# Altium PCB EE209_PCB_Team08.PcbDoc
Units mil, origin at the board's own origin, x right, y up, seen from the top; angles counter-clockwise.
Board outline 3690 x 3780 mil, 2 copper layers (Top Layer, Bottom Layer); 55 components, 37 nets, 188 pads, 0 vias.
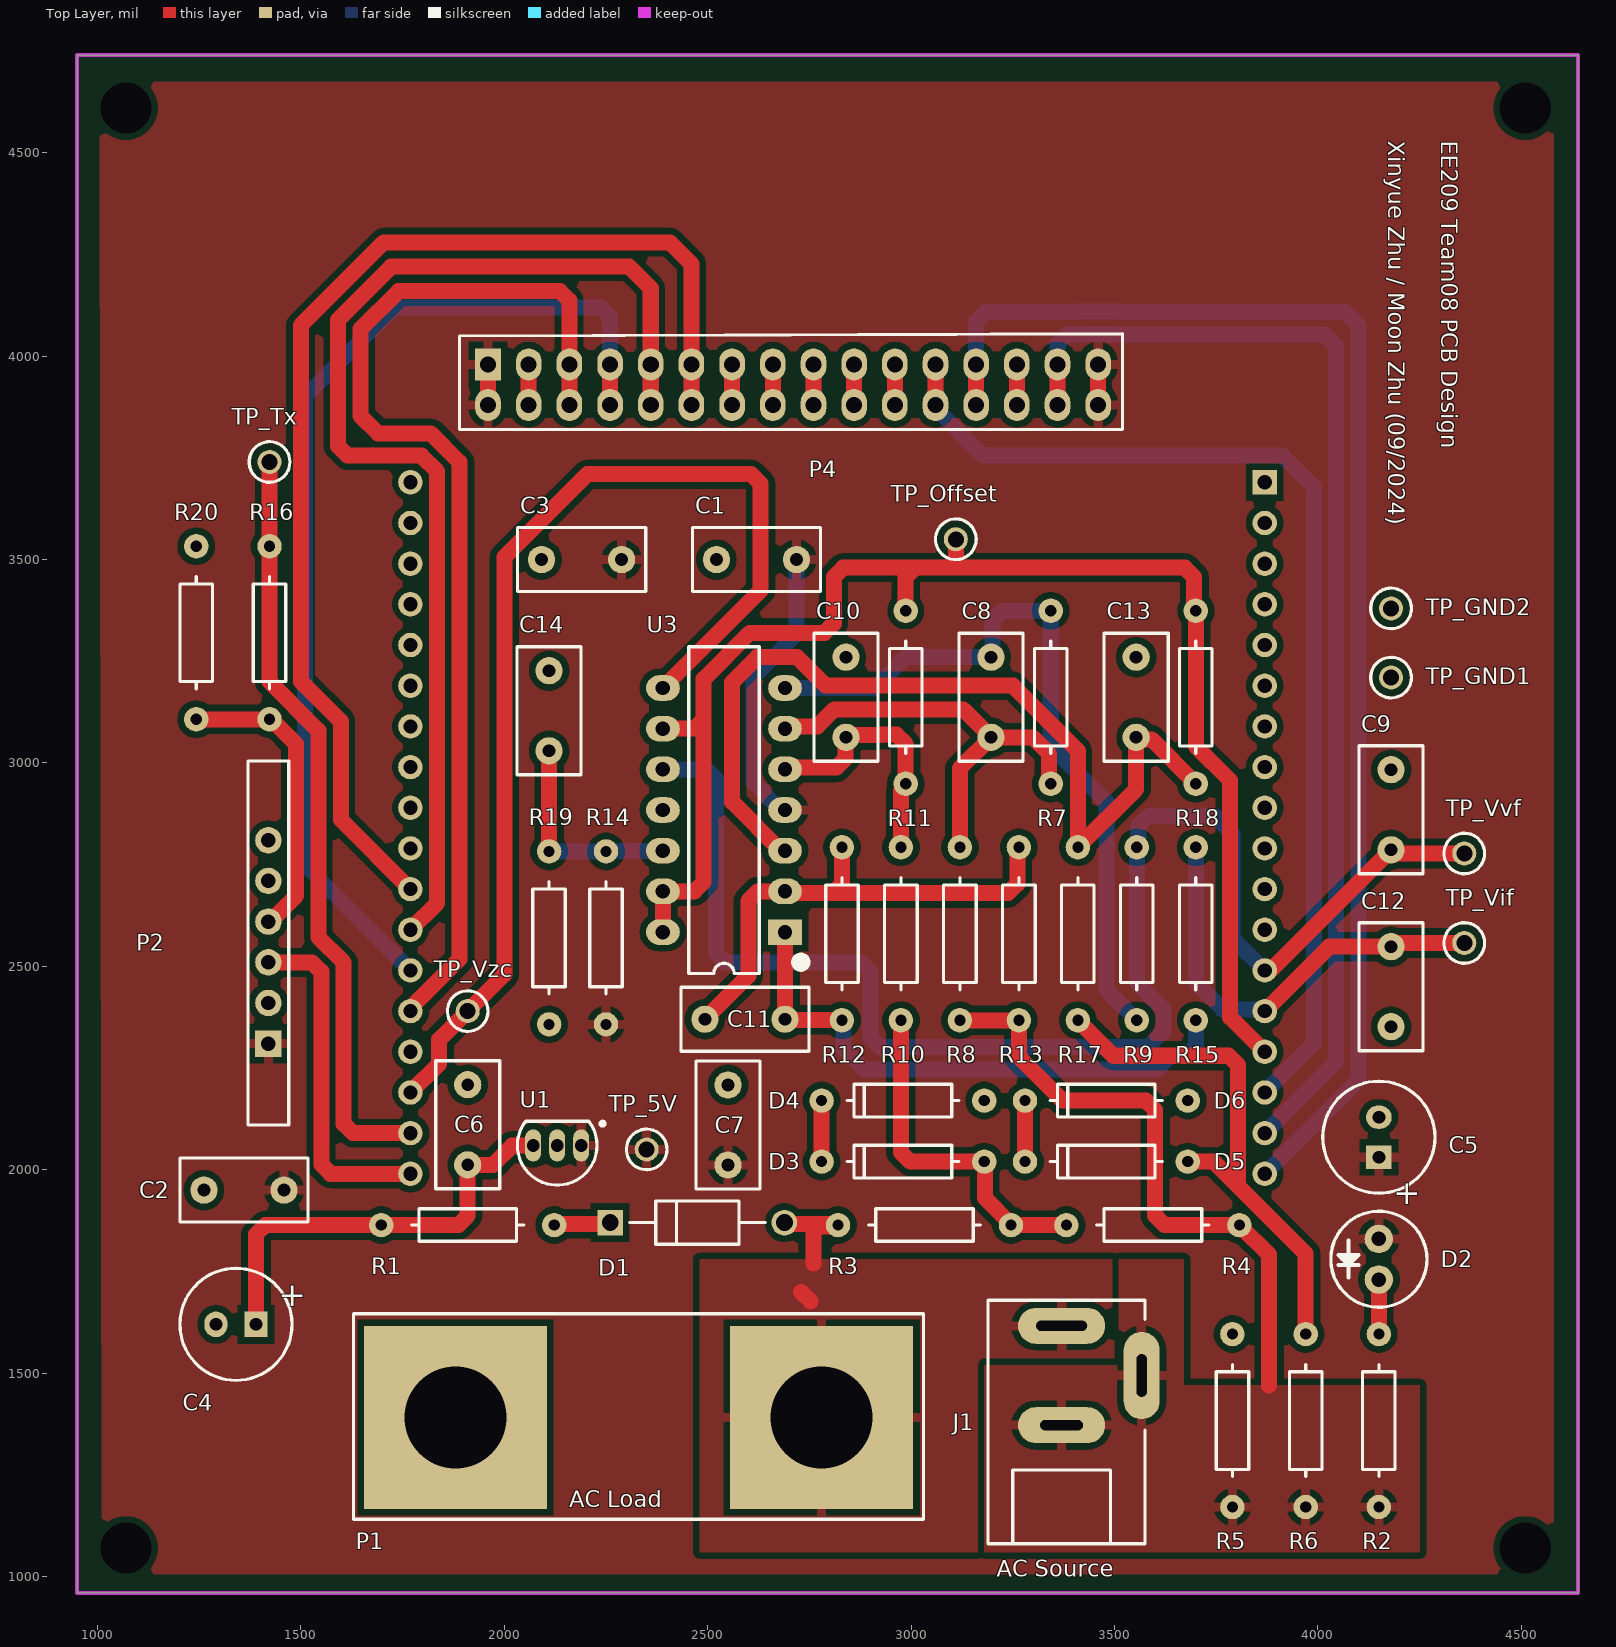
[diagram p0: Top Layer view]
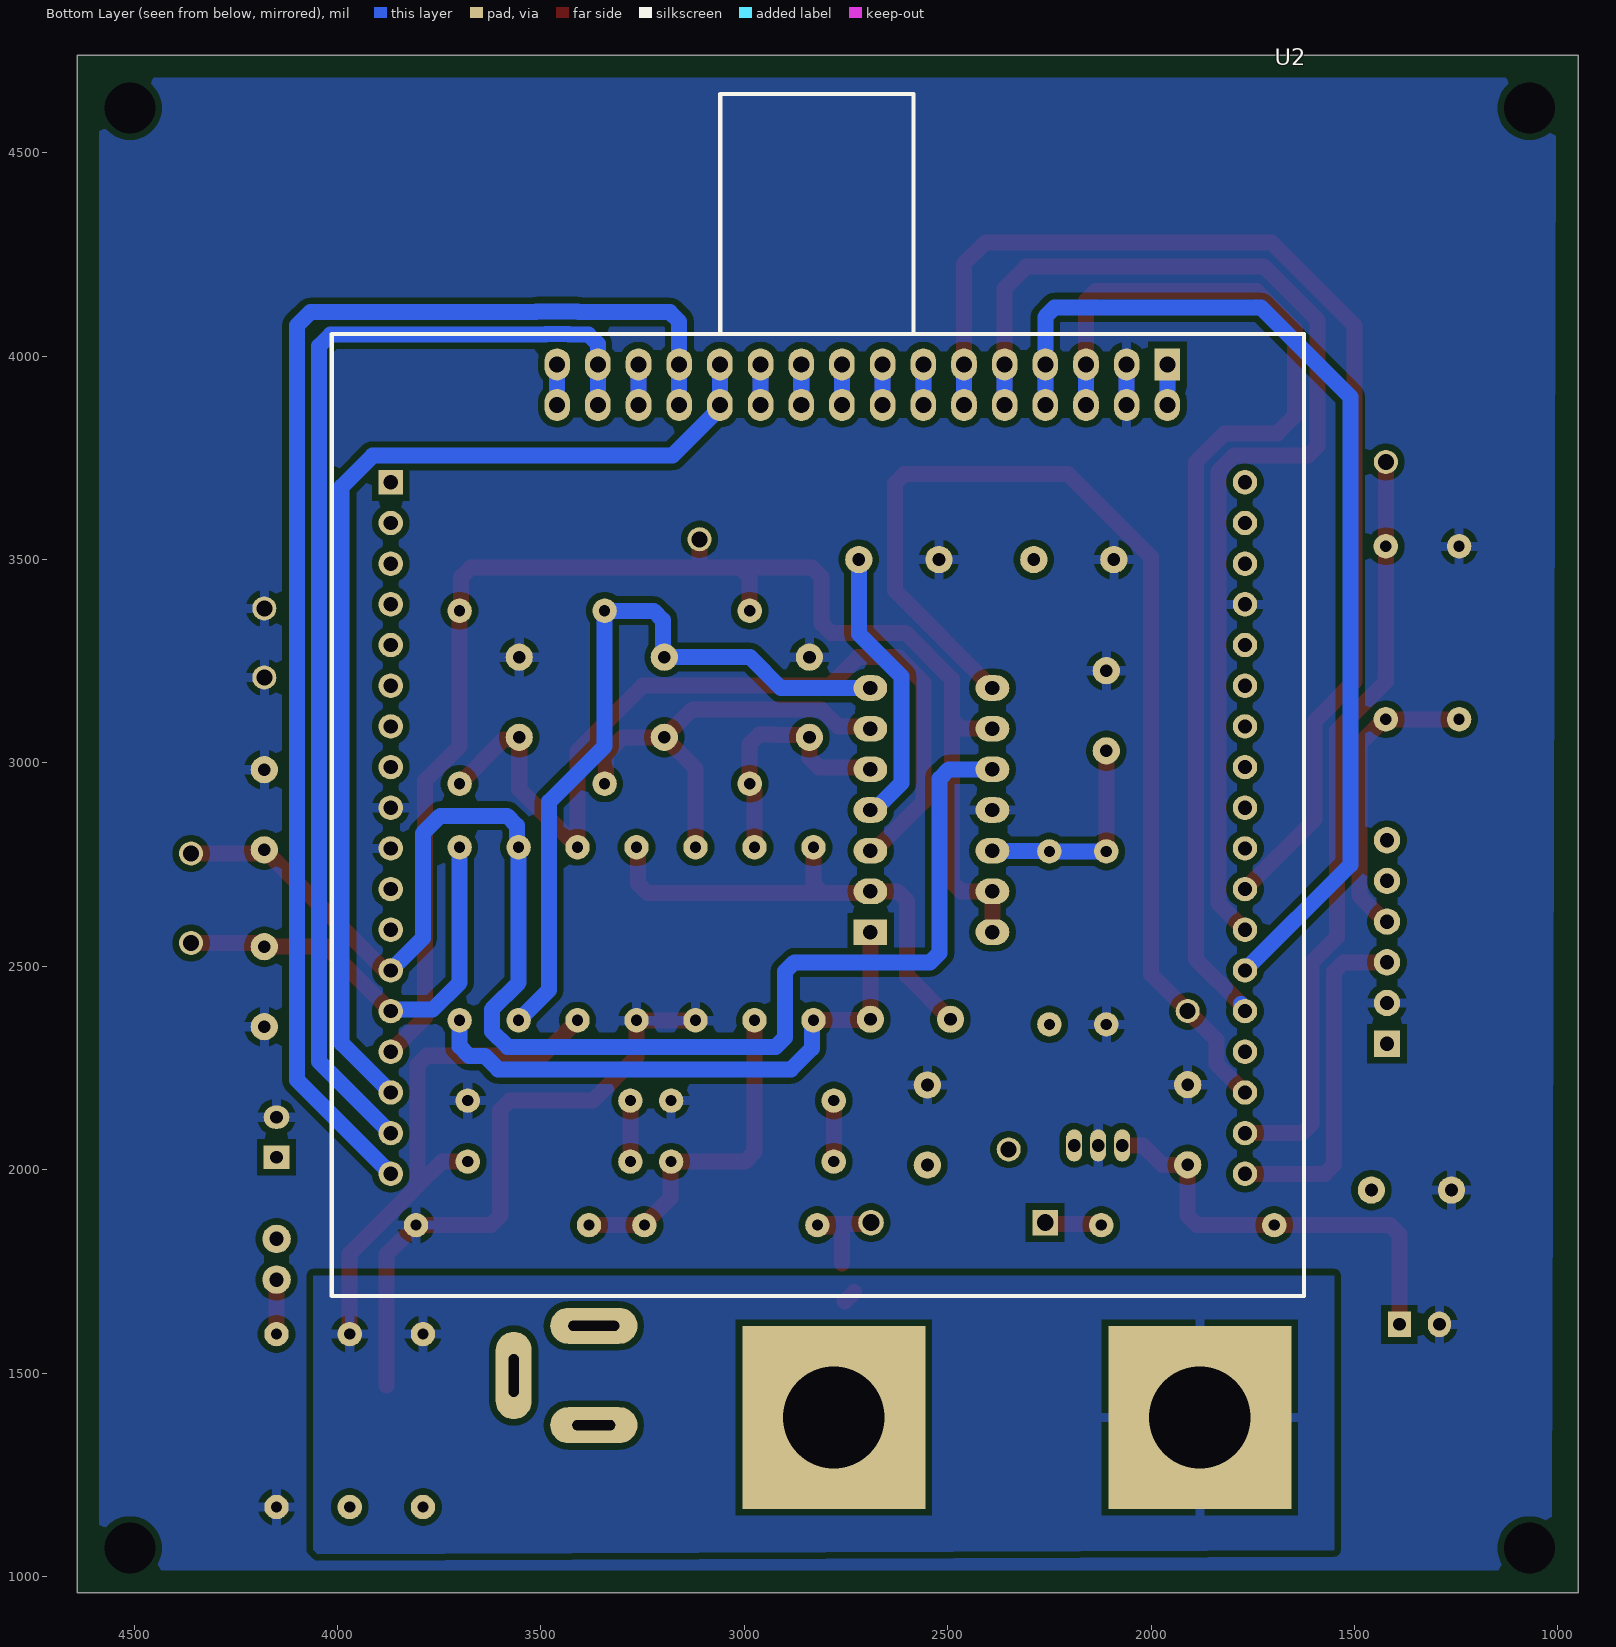
[diagram p1: Bottom Layer view, seen from below]
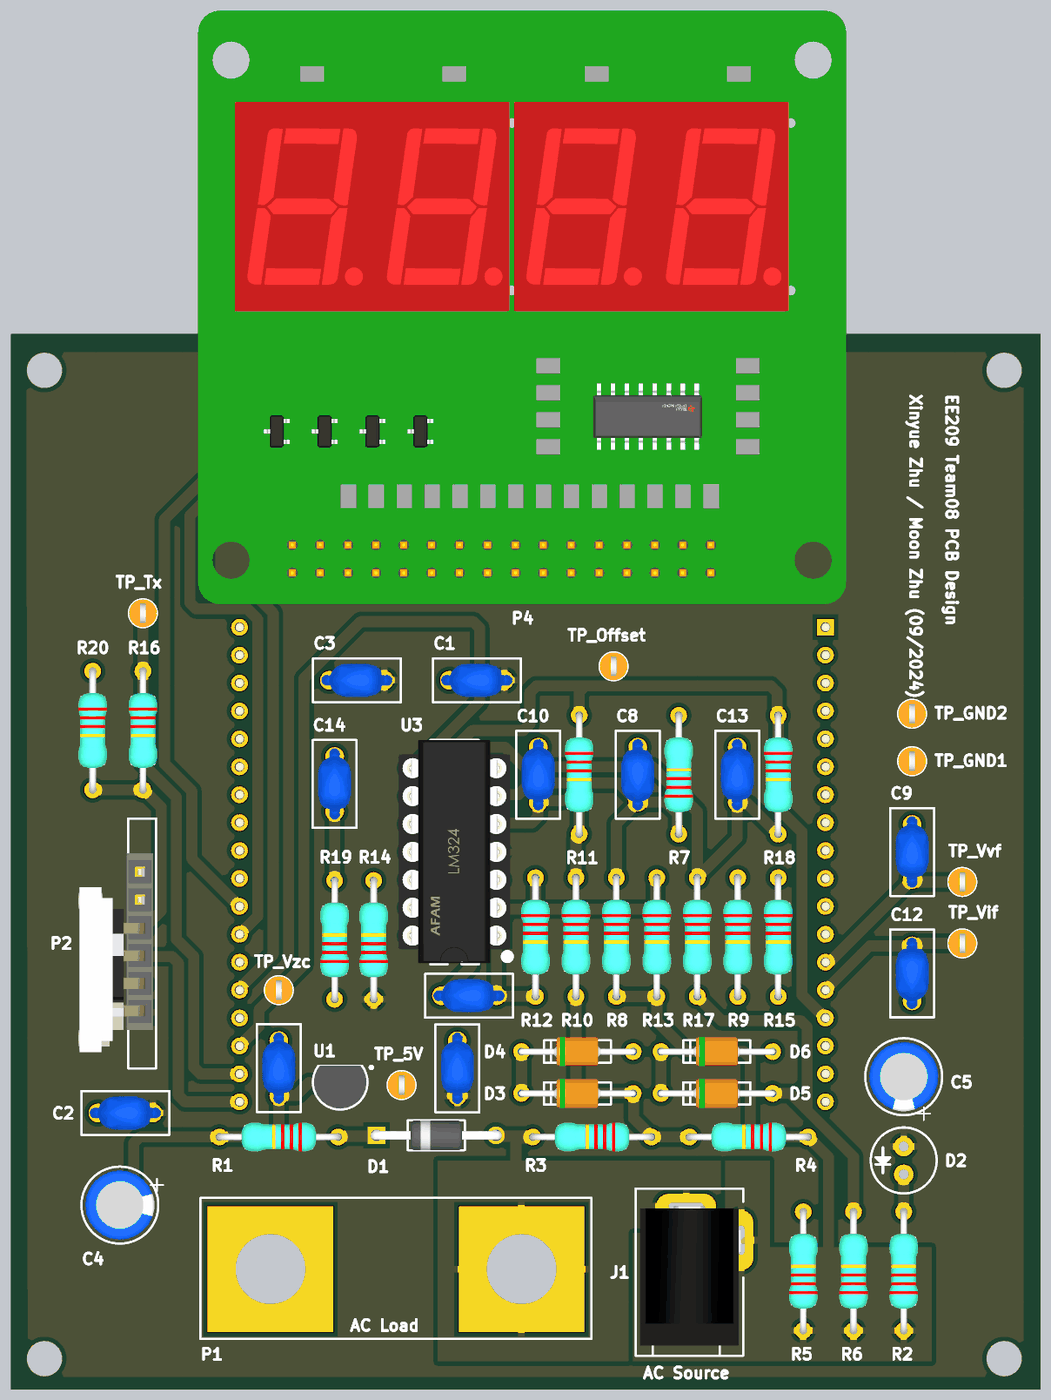
[diagram p2: 3D render of the assembled board from above, using the file's embedded part models]

## Layer stack, top to bottom
Top Solder: solder mask 0.4, Solder Resist, Dk 3.5
Top Layer: signal copper 1.4
Dielectric 1: dielectric 12.6, FR-4, Dk 4.8
Bottom Layer: signal copper 1.4
Bottom Solder: solder mask 0.4, Solder Resist, Dk 3.5

## Board outline
950,960 4640,960 4640,4740 950,4740

## Design rules (kind name [scope] priority, off if disabled: settings)
Clearance [All] p1: gap=15.75 ignorepadtopadclearanceinfootprint=FALSE
Height [All] p1: minheight=0 maxheight=1968.5 prefheight=11.81
HoleSize [All] p1: absolutevalues=TRUE maxlimit=393.7 minlimit=15.75 maxpercent=80.000 minpercent=20.000
PolygonConnect [All] p1: connectstyle=Relief reliefconductorwidth=23.62 reliefentries=4 polygonreliefangle="90 Angle" airgapwidth=15.75
RoutingVias [All] p1: holewidth=28 width=50 viastyle="Through Hole" minholewidth=28 minwidth=50 maxholewidth=28 maxwidth=50
SilkToSilkClearance [All] p1: silktosilkclearance=3.94
SilkToSolderMaskClearance [IsPad] p1: minsilkscreentomaskgap=3.94 clearancetoexposedcopper=TRUE
SolderMaskExpansion [All] p1: expansion=4 istentingtop=FALSE
SupplyNets "Schematic Supply Nets_24" [InNet('SH_ST')] p1: voltage=0.000
SupplyNets "Schematic Supply Nets_23" [InNet('GND')] p2: voltage=0.000
SupplyNets "Schematic Supply Nets_22" [InNet('Vrect')] p3: voltage=0.000
SupplyNets "Schematic Supply Nets_21" [InNet('RX')] p4: voltage=0.000
SupplyNets "Schematic Supply Nets_20" [InNet('LED3')] p5: voltage=0.000
SupplyNets "Schematic Supply Nets_19" [InNet('DS4')] p6: voltage=0.000
SupplyNets "Schematic Supply Nets_18" [InNet('Isensp')] p7: voltage=0.000
SupplyNets "Schematic Supply Nets_17" [InNet('SH_DS')] p8: voltage=0.000
SupplyNets "Schematic Supply Nets_16" [InNet('DS1')] p9: voltage=0.000
SupplyNets "Schematic Supply Nets_15" [InNet('OE')] p10: voltage=0.000
SupplyNets "Schematic Supply Nets_14" [InNet('SH_CP')] p11: voltage=0.000
SupplyNets "Schematic Supply Nets_13" [InNet('LED1')] p12: voltage=0.000
SupplyNets "Schematic Supply Nets_12" [InNet('TX')] p13: voltage=0.000
SupplyNets "Schematic Supply Nets_11" [InNet('Vzc')] p14: voltage=0.000
SupplyNets "Schematic Supply Nets_10" [InNet('Imeas')] p15: voltage=0.000
SupplyNets "Schematic Supply Nets_9" [InNet('Vmeas')] p16: voltage=0.000
SupplyNets "Schematic Supply Nets_8" [InNet('Vsensp')] p17: voltage=0.000
SupplyNets "Schematic Supply Nets_7" [InNet('DS2')] p18: voltage=0.000
SupplyNets "Schematic Supply Nets_6" [InNet('Offset')] p19: voltage=0.000
SupplyNets "Schematic Supply Nets_5" [InNet('LED2')] p20: voltage=0.000
SupplyNets "Schematic Supply Nets_4" [InNet('LED4')] p21: voltage=0.000
SupplyNets "Schematic Supply Nets_3" [InNet('5V')] p22: voltage=0.000
SupplyNets "Schematic Supply Nets_2" [InNet('SRCLR')] p23: voltage=0.000
SupplyNets "Schematic Supply Nets_1" [InNet('Vin')] p24: voltage=0.000
SupplyNets "Schematic Supply Nets" [InNet('DS3')] p25: voltage=0.000
Width [All] p1: maxlimit=393.7 minlimit=15.75 preferedwidth=23.62
26 further rules are at their usual default settings.

## Components (designator, comment, footprint, x,y, rotation, side; value= is the part's Value field where it differs from the comment)
C1 "*" CCAP-5P0 2620,3500 r180 top
C2 "*" CCAP-5P0 1360,1950 r180 top
C3 "*" CCAP-5P0 2190,3500 r180 top
C4 "*" "CAP-RAD-2.5mm Pitch" 1340.32,1620 r180 top
C5 "*" "CAP-RAD-2.5mm Pitch" 4150,2080 r90 top
C6 "*" CCAP-5P0 1910,2110.63 r90 top
C7 "*" CCAP-5P0 2550,2110 r90 top
C8 "*" CCAP-5P0 3196.64,3161.57 r270 top
C9 "*" CCAP-5P0 4180,2885 r90 top
C10 "*" CCAP-5P0 2840,3161.57 r90 top
C11 "*" CCAP-5P0 2591.57,2370 r180 top
C12 "*" CCAP-5P0 4180,2450 r270 top
C13 "*" CCAP-5P0 3553.27,3161.57 r90 top
C14 "*" CCAP-5P0 2110,3128.43 r90 top
D1 "1N4007" 1N4007-MFG 2474.42,1870 r0 top
D2 "Green" LED 4150,1780 r270 top
D3 "BZX79-CXVX" AXIAL-Zener-0.4 2980,2020 r180 top
D4 "BZX79-CXVX" AXIAL-Zener-0.4 2980,2170 r180 top
D5 "BZX79-CXVX" AXIAL-Zener-0.4 3480,2020 r180 top
D6 "BZX79-CXVX" AXIAL-Zener-0.4 3480,2170 r180 top
J1 "DC barrel jack" AC-Socket 3370,1380 r90 top value=socket
P1 "Dual Banana Plugs" "Dual Banana Plug" 2330,1390.79 r180 top
P2 "BLE Module Header" HM10_HDR1X6 1420,2310 r90 top
P4 "Display" Display 2660,3930 r180 top
R1 "*" AXIAL-0.4 1910,1864 r180 top
R2 "*" AXIAL-0.4 4150,1383.45 r90 top
R3 "*" AXIAL-0.4 3032.99,1864 r180 top
R4 "*" AXIAL-0.4 3594.48,1864 r180 top
R5 "*" AXIAL-0.4 3790,1383.45 r90 top
R6 "*" AXIAL-0.4 3970,1383.45 r90 top
R7 "*" AXIAL-0.4 3343.36,3161.57 r90 top
R8 "*" AXIAL-0.4 3120,2580 r270 top
R9 "*" AXIAL-0.4 3555,2580 r270 top
R10 "*" AXIAL-0.4 2975,2580 r270 top
R11 "*" AXIAL-0.4 2986.73,3161.57 r270 top
R12 "*" AXIAL-0.4 2830,2580 r270 top
R13 "*" AXIAL-0.4 3265,2580 r270 top
R14 "*" AXIAL-0.4 2250,2570 r90 top
R15 "*" AXIAL-0.4 3700,2580 r270 top
R16 "*" AXIAL-0.4 1422.86,3320 r270 top
R17 "*" AXIAL-0.4 3410,2580 r270 top
R18 "*" AXIAL-0.4 3700,3161.57 r270 top
R19 "*" AXIAL-0.4 2110,2570 r90 top
R20 "*" AXIAL-0.4 1242.74,3320 r270 top
TP_5V "5003" TP_TH 2350,2050 r90 top
TP_GND1 "5003" TP_TH 4180,3210 r90 top
TP_GND2 "5003" TP_TH 4180,3380 r90 top
TP_Offset "5003" TP_TH 3110,3550 r90 top
TP_Tx "5003" TP_TH 1422.86,3740 r90 top
TP_Vif "5003" TP_TH 4360,2557.48 r90 top
TP_Vvf "5003" TP_TH 4360,2777.52 r90 top
TP_Vzc "5003" TP_TH 1910,2390 r90 top
U1 "L78L05ACZ" TO-92 2130,2060 r90 top
U2 "ATmega328PB Xplained Mini Header" "ATmeg328P Xplained" 2819.21,2840 r180 bottom
U3 "LM324" DIP-14 2540,2884.33 r180 top

## Footprints (in the part's own frame and the unit in brackets; to place one, negate y for a bottom-side part, rotate by r counter-clockwise, add the part's x,y. Pads: shape width x height; smd on the part's side, far side on the other; paste and mask are expansions set on the pad)
1N4007-MFG [mm]
  round 1.6 hole 1.05 paste-2539.97 mask+0: 1(5.438,0)
  rect 1.6x1.6 hole 1.05 paste-2539.97 mask+0: 2(-5.438,0)
  silkscreen extent -4.24,-1.35 4.24,1.35, body extent -6.34,-1.45 6.34,1.45, height 0.25
AC-Socket [mm]
  oval 2.25x5.45 hole 0.635 slot 3.175 at 90 deg: 1(6,0)
  oval 5.45x2.25 hole 0.635 slot 2.667 at 0 deg: 2(2.9,-5)
  oval 2.25x5.45 hole 0.635 slot 2.667 at 90 deg: 3(-0.2,0)
  silkscreen extent -7.6,-5.2 7.6,4.6, body extent -6.7,-5 6,4.2, height 10.5
"ATmeg328P Xplained" [mil]
  rect 60x60 hole 35: 1(-1050,850)
  round 60 hole 35: 2(-1050,750) 3(-1050,650) 4(-1050,550) 5(-1050,450) 6(-1050,350) 7(-1050,250) 8(-1050,150) 9(-1050,50) 10(-1050,-50) 11(-1050,-150) 12(-1050,-250) 13(-1050,-350) 14(-1050,-450) 15(-1050,-550) 16(-1050,-650) 17(-1050,-750) 18(-1050,-850) 19(1050,-850) 20(1050,-750) 21(1050,-650) 22(1050,-550) 23(1050,-450) 24(1050,-350) 25(1050,-250) 26(1050,-150) 27(1050,-50) 28(1050,50) 29(1050,150) 30(1050,250) 31(1050,350) 32(1050,450) 33(1050,550) 34(1050,650) 35(1050,750) 36(1050,850)
  silkscreen extent -1195,-1150 1195,1805, body extent -1201,-1150 1161,1845, height 452
AXIAL-0.4 [mil]
  round 60 hole 27.56: 1(-212.6,0) 2(212.6,0)
  silkscreen extent -138,-40 138,40, body extent -224,-51 224,51, height 106
AXIAL-Zener-0.4 [mil]
  round 60 hole 27.56: 1(-200,0) 2(200,0)
  silkscreen extent -138,-40 138,40, body extent -211,-52 211,52, height 92
"CAP-RAD-2.5mm Pitch" [mm] "Cap 6.3 X 11.2"
  rect 1.45x1.6 hole 0.8: 1(-1.25,0)
  oval 1.45x1.6 hole 0.8: 2(1.25,0)
  silkscreen extent -3.5,-3.5 3.5,3.5, body extent -3.15,-3.15 3.15,3.15, height 11.5
CCAP-5P0 [mm]
  round 1.7 hole 0.8: 1(-2.5,0) 2(2.5,0)
  silkscreen extent -4,-2 4,2, body extent -3.25,-1.5 3.25,1.5, height 6.5
DIP-14 [mm] "DIP; 14 Leads; Row Spacing 7.62 mm; Pitch 2.54 mm"
  rect 2.1x1.6 hole 0.9: 1(-3.81,7.62)
  oval 2.1x1.6 hole 0.9: 2(-3.81,5.08) 3(-3.81,2.54) 4(-3.81,0) 5(-3.81,-2.54) 6(-3.81,-5.08) 7(-3.81,-7.62) 8(3.81,-7.62) 9(3.81,-5.08) 10(3.81,-2.54) 11(3.81,0) 12(3.81,2.54) 13(3.81,5.08) 14(3.81,7.62)
  silkscreen extent -5.1,-10.2 2.2,10.2, body extent -5.07,-10.2 5.09,10.12, height 9.47
Display [mm]
  rect 1.6x2 hole 1: 1(17.78,-1.27)
  oval 1.6x2 hole 1: 2(17.78,1.27) 3(15.24,-1.27) 4(15.24,1.27) 5(12.7,-1.27) 6(12.7,1.27) 7(10.16,-1.27) 8(10.16,1.27) 9(7.62,-1.27) 10(7.62,1.27) 11(5.08,-1.27) 12(5.08,1.27) 13(2.54,-1.27) 14(2.54,1.27) 15(0,-1.27) 16(0,1.27) 17(-2.54,-1.27) 18(-2.54,1.27) 19(-5.08,-1.27) 20(-5.08,1.27) 21(-7.62,-1.27) 22(-7.62,1.27) 23(-10.16,-1.27) 24(-10.16,1.27) 25(-12.7,-1.27) 26(-12.7,1.27) 27(-15.24,-1.27) 28(-15.24,1.27) 29(-17.78,-1.27) 30(-17.78,1.27) 31(-20.32,-1.27) 32(-20.32,1.27)
  silkscreen extent -21.84,-3.18 19.56,2.79, body extent -32.6,-50 26.4,4, height 13
"Dual Banana Plug" [mil] "Connector; 2 Position"
  rect 450x450 hole 250: 1(-450,0) 2(450,0)
  silkscreen extent -701,-255 701,250, body extent -684,-236 686,236, height 217
HM10_HDR1X6 [mil] "Connector; Header; 6 Position"
  rect 65x65 hole 35.43: 1(0,0)
  round 65 hole 35.43: 2(100,0) 3(200,0) 4(300,0) 5(400,0) 6(500,0)
  silkscreen extent -200,-50 695,50, body extent -142,-39 571,228, height 1843
LED [mil]
  round 70 hole 35.43: 1(-50,0) 2(50,0)
  silkscreen extent -118,-118 118,118, body extent -98,-98 98,98, height 413
TO-92 [mm] "TO, Flat Index; 3 In-Line, Axial Leads; Body Dia. 4.5mm; Leads 0.51 x 0.48 mm (max)"
  oval 2x1 hole 0.8: 1(0,-1.5) 2(0,0) 3(0,1.5)
  silkscreen extent -2.48,-2.96 1.5,2.48, body extent -2.4,-2.4 1.53,2.4, height 6.73
TP_TH [mm] "Test Point, Through Hole, Dia 2.54mm"
  round 1.5 hole 1: 1(0,0)
  silkscreen extent -1.27,-1.27 1.27,1.27, body extent -1.27,-1.27 1.27,1.27, height 4.57

## Part data
C1 C2 C3 C6 C7 C8 C9 C10 C11 C12 C13 C14: library part CerCap_TH_5P0, "TH ceramic capacitor with 5mm pitch"
C4 C5: library part ElecCap_TH_2P0, "Electrolytic capacitor with radial package, 2mm pitch and 5.2mm diameter", LatestRevisionDate=17-Jul-2002, LatestRevisionNote="Re-released for DXP Platform.", PackageDescription="Polarized Capacitor; 2 Leads", PackageReference=POLAR0.8, Published=8-Jun-2000, Publisher="Altium Limited"
D1: library part 1N4007_TH_4AX0, "1N4007 1000V standard axial diode", Supplier Part Number 1=1N4007RLGOSCT-ND, ComponentLink1Description=https://www.fairchildsemi.com/datasheets/1N/1N914.pdf, ComponentLink1URL=https://www.fairchildsemi.com/datasheets/1N/1N914.pdf, Supplier 1=Digi-Key
D2: library part LED_TH_2P54, "Typical throughole GaAs LED with 2.54mm pitch", Manufacturer="Generic Components", Class I=Optoelectronic, Class II=LED, Published=8-Jun-2000, Publisher="Altium Limited", Revision="July-2002: Re-released for DXP Platform."
D3 D4 D5 D6: library part Zener_TH_4AX0, "Axial zener diode BZX79 series", Manufacturer="Nexperia USA Inc.", Manufacturer Part Number=BZX79-C4V7,143, Operating Temperature="-65°C ~ 200°C", Package / Case="DO-204AH, DO-35, Axial", Supplier Device Package=DO-35, Supplier Part Number 1=1727-1864-1-ND, Tolerance=±5%, Category="Discrete Semiconductor Products", ComponentLink1Description=https://assets.nexperia.com/documents/data-sheet/BZX79.pdf, ComponentLink1URL=https://assets.nexperia.com/documents/data-sheet/BZX79.pdf, Mounting Type="Through Hole", Packaging="Cut Tape (CT)", Part Status=Active, Pricing 1="1=0.23, 10=0.206, 100=0.1123, 500=0.06912, 1000=0.04714 (NZD)", RoHS="RoHS Compliant", Stock 1=8933, Supplier 1=Digi-Key
J1: library part AC_Input, "DC barrel jack connection to AC source"
P1: library part AC_Output, "Dual banana plugs connection to the AC load", LatestRevisionDate=17-Jul-2002, LatestRevisionNote="Re-released for DXP Platform.", Publisher="Altium Limited"
P2: library part BLEModule_TH, "2.54mm pitch 6-pin header for BLE module", LatestRevisionDate=17-Jul-2002, LatestRevisionNote="Re-released for DXP Platform.", Publisher="Altium Limited"
P4: "16-Pin Header Connecting Display"
R1 R2 R3 R4 R5 R6 R7 R8 R9 R10 R11 R12 R13 R14 R15 R16 R17 R18 R19 R20: library part Res_TH_0AX4, "Through hole resistor", ComponentLink1Description=http://www.royalohm.com/pdf/product2017/PrecisionMetalMF.pdf, LatestRevisionDate=17-Jul-2002, LatestRevisionNote="Re-released for DXP Platform.", PackageReference=AXIAL-0.4, Published=8-Jun-2000, Publisher="Altium Limited"
TP_5V TP_GND1 TP_GND2 TP_Offset TP_Tx TP_Vif TP_Vvf TP_Vzc: library part TestPoint, "Test Point, Orange, 1-Pin THD, RoHS", Forward Current="3 A", Forward Voltage="1.08 V", Max Operating Temperature="150 degC", Max Surge Current="80 A", Min Operating Temperature="-65 degC", Package Quantity=500, Peak Reverse Current="600 uA", ComponentLink1Description="Manufacturer URL", ComponentLink1URL=http://www.keyelco.com/, ComponentLink2Description=Datasheet, ComponentLink2URL=http://keyelco.com/userAssets/file/M65p56.pdf, DatasheetVersion=Jun-15, Diameter="5.3 mm", Height="0.25 inch", Length="9.5 mm", Mount="Through Hole", PackageDescription="1-Pin Through Hole Device, Dia 2.54 mm", PackageReference=5003, Packaging=Bulk, Pins=2, Radiation Hardening=No, REACH SVHC="No SVHC", RoHSCompliant=true, Weight="0.01 lb", Width="0.25 inch"
U1: library part L78L05_TH_TO92, "Voltage Regulator 5V", Base Part Number=LM78L05, Current - Output=100mA, Manufacturer="ON Semiconductor", Manufacturer Part Number=LM78L05ACZX, Operating Temperature="-40°C ~ 125°C", Package / Case="TO-226-3, TO-92-3 (TO-226AA) (Formed Leads)", Supplier Device Package=TO-92-3, Supplier Part Number 1=LM78L05ACZXCT-ND, Voltage - Input (Max)=30V, Voltage - Output (Max)=-, Voltage - Output (Min/Fixed)=5V, Category="Integrated Circuits (ICs)", ComponentLink1Description=https://www.fairchildsemi.com/datasheets/MC/MC78L05A.pdf, ComponentLink1URL=https://www.fairchildsemi.com/datasheets/MC/MC78L05A.pdf, Control Features=-, Mounting Type="Through Hole", Output Configuration=Positive, Output Type=Fixed, Packaging="Cut Tape (CT)", Part Status=Active, Pricing 1="1=0.69, 10=0.517, 100=0.3226, 500=0.2207, 1000=0.16976 (NZD)", Protection Features="Over Temperature, Short Circuit", PSRR="80dB (120Hz)", RoHS="RoHS Compliant", Stock 1=7782, Supplier 1=Digi-Key, Voltage Dropout (Max)=-
U2: library part ATmega328PBXplained_TH, "Dual 18-pin headers connecting to ATmega328PB Xplained Mini", Manufacturer="Microchip Technology", Manufacturer Part Number=ATMEGA328PB-XMINI, Operating System=-, Supplier Part Number 1=ATMEGA328PB-XMINI-ND, Board Type="Evaluation Platform", Category="Development Boards, Kits, Programmers", ComponentLink1Description=http://www.microchip.com/mymicrochip/filehandler.aspx?ddocname=en589665, ComponentLink1URL=http://www.microchip.com/mymicrochip/filehandler.aspx?ddocname=en589665, Contents=Board(s), Core Processor=AVR, For Use With/Related Products=ATmega328P, Mounting Type=Fixed, Part Status=Active, Platform="ATmega328P Xplained Mini", Pricing 1="1=15.11 (NZD)", RoHS="RoHS Compliant", Stock 1=454, Supplier 1=Digi-Key, Type="MCU 8-Bit"
U3: library part LM324N_TH_DIP16, "IC OPAMP GP 14DIP", Current - Supply=1mA, Manufacturer="ON Semiconductor", Manufacturer Part Number=LM324N, Operating Temperature="0°C ~ 70°C", Package / Case="14-DIP (0.300\", 7.62mm)", Supplier Device Package=14-DIP, Supplier Part Number 1=LM324NFS-ND, Voltage - Supply, Single/Dual (±)="3 V ~ 32 V, ±1.5 V ~ 16 V", Amplifier Type="General Purpose", Base Part Number=LM324, Category="Integrated Circuits (ICs)", ComponentLink1Description=https://www.fairchildsemi.com/datasheets/LM/LM2902.pdf, ComponentLink1URL=https://www.fairchildsemi.com/datasheets/LM/LM2902.pdf, Mounting Type="Through Hole", Output Type=-, Packaging=Tube, Part Status=Active, Pricing 1="1=0.9, 10=0.775, 100=0.5789, 500=0.45482, 1000=0.35145 (NZD)", RoHS="RoHS Compliant", Slew Rate=-, Stock 1=2900, Supplier 1=Digi-Key

## Free pads (board coordinates)
  round 60 hole 125.98: 2(1070,4610) 4(4510,4610) 5(1070,1070) 6(4510,1070)

## Nets (pads, with @x,y where several pads share a name; then routed paths per layer and width w, separated by ;. In a path a pad name is that pad's centre, name@x,y a point inside that pad or via, vN(x,y) a via of type N, cw(c..) or ccw(c..) an arc to the next point about the centre after c; other vN are vias at no path point)
5V: C1.1 C2.1 C3.1 C5.1 C7.1 D2.1 P2.1 P4.1 P4.2 P4.31 P4.32 R14.1 TP_5V.1 U1.1 U3.4 | length 1096.8
  Top Layer w39.37: P4.2 P4.1 ; P4.32 P4.31
  Bottom Layer w39.37: P4.2 P4.1 ; U3.4 2680.16,2884.33 2613.23,2951.26 2613.23,3212.05 2718.43,3317.25 C1.1 ; P4.32 P4.31
DS1: P4.5 P4.6 U2.23 | length 2853
  Top Layer w39.37: U2.23 1769.21,2395.58 1779.53,2405.9 1779.53,2407.78 1889.76,2518.01 1889.76,3739.93 1819.15,3810.55 1689.45,3810.55 1646.31,3853.69 1646.31,4066.31 1740,4160 2136.94,4160 2160,4136.94 P4.5 P4.6 P4.6@2160,3877.47
  Bottom Layer w39.37: U2.23 1769.21,2395.58 1779.53,2405.9 U2.23@1779.53,2407.78 ; P4.5@2155.48,3984.52 P4.5 P4.6
DS2: P4.7 P4.8 U2.24 | length 2685
  Top Layer w39.37: P4.8 P4.7
  Bottom Layer w39.37: U2.24 1510,2749.21 1510,3900 1730,4120 2236.94,4120 2260,4096.94 P4.7 P4.8
DS3: P4.9 P4.10 U2.25 | length 2965.5
  Top Layer w39.37: U2.25 1834.65,2655.43 1834.65,3717.1 1796.32,3755.43 1666.62,3755.43 1614.57,3755.43 1591.19,3778.81 1591.19,4089.14 1722.05,4220 2306.94,4220 2360,4166.94 P4.9 P4.10
  Bottom Layer w39.37: P4.10 P4.9
DS4: P4.11 P4.12 U2.26 | length 3010.9
  Top Layer w39.37: U2.26 1598.17,2861.04 1598.17,3102.58 1500,3200.75 1500,4075.9 1704.1,4280 2406.94,4280 2460,4226.94 P4.11 P4.12
  Bottom Layer w39.37: P4.12 P4.11
GND: C1.2 C2.2 C3.2 C4.2 C5.2 C6.2 C7.2 C9.2 C10.2 C12.2 C13.2 C14.2 D4.1 D6.1 J1.2 J1.3 P2.2 P4.3 P4.4 R2.1 R4.1 R5.1 R6.1 R8.2 R13.2 R19.1 R20.1 TP_GND1.1 TP_GND2.1 U1.2 U2.9 U2.10 U2.33 U3.11 | length 1724.7
  Top Layer w39.37: P4.4 P4.3 ; R8.2 R13.2 3265,2277.54 3372.54,2170 3576.94,2170 3600,2146.94 3600,1887.06 3623.06,1864 R4.1 3880,1791.08 3880,1470
  Bottom Layer w39.37: P4.4 P4.3
Imeas: C12.1 R15.1 TP_Vif.1 U2.14 | length 1091
  Top Layer w39.37: U2.14 4027.64,2548.43 C12.1 4187.46,2548.43 4196.51,2557.48 TP_Vif.1
  Bottom Layer w39.37: R15.1 3700,2460 3766.05,2393.95 3865.27,2393.95 U2.14
Isensp: D5.1 P1.2 R5.2 R6.2 R17.2 | length 1315.1
  Top Layer w39.37: R17.2 3497.12,2280.28 3780.72,2280.28 3803.78,2257.22 3803.78,2050.83 3803.78,1962.9 ; D5.1 3743.61,2020 3802.25,1961.36 3820,1943.61 3970,1793.61 R6.2
LED1: P4.13 P4.14 | length 200
  Top Layer w39.37: P4.14 P4.13
  Bottom Layer w39.37: P4.14 P4.13
LED2: P4.15 P4.16 | length 200
  Top Layer w39.37: P4.16 P4.15
  Bottom Layer w39.37: P4.16 P4.15
LED3: P4.17 P4.18 | length 200
  Top Layer w39.37: P4.18 P4.17
  Bottom Layer w39.37: P4.18 P4.17
LED4: P4.19 P4.20 | length 200
  Top Layer w39.37: P4.20 P4.19
  Bottom Layer w39.37: P4.20 P4.19
NetC8_1: C8.1 R7.2 R9.2 U3.7 | length 1887.3
  Top Layer w39.37: C8.1 C8.1@3200,3263.36 ; R7.2@3340,3370.81 R7.2
  Bottom Layer w39.37: U3.7 2909.87,3184.33 2985.54,3260 C8.1 3200,3263.36 3200,3351.11 3223.06,3374.17 R7.2 3343.36,3041.51 3480,2904.88 3480,2442.4 R9.2
NetC8_2: C8.2 R7.1 R8.1 U3.6 | length 1092.1
  Top Layer w39.37: U3.6 2694.52,3088.85 2721.07,3088.85 2722.22,3090 2769.41,3090 2811.46,3132.05 3127.74,3132.05 C8.2 ; R8.1 3120,2986.51 C8.2 ; R7.1 3339.42,2952.92 3339.42,3022.64 3298.9,3063.15 C8.2
NetC10_1: C10.1 R10.1 R11.2 U3.5 | length 630.5
  Top Layer w39.37: U3.5 2694.52,2988.85 2816.07,2988.85 2839.13,3011.91 2839.13,3062.28 2845.27,3068.42 2922.72,3068.42 2924.29,3070 2963.66,3070 2986.73,3046.94 R11.2 2986.73,2943.39 2975,2931.67 R10.1
NetC11_1: C11.1 R12.2 R15.2 U3.1 | length 1402
  Top Layer w39.37: U3.1 2690,2368.7 2828.7,2368.7 R12.2
  Bottom Layer w39.37: R12.2 2833.95,2363.45 2833.95,2298.1 2885.2,2246.85 3604.93,2246.85 3638.08,2280 3676.94,2280 3700,2303.06 R15.2
NetC11_2: C11.2 R12.1 R13.1 U3.2 | length 1230.8
  Top Layer w39.37: C11.2 2600,2476.85 2600,2661.27 2623.06,2684.33 U3.2 2694.33,2680 2806.94,2680 ; R12.1 2830,2703.06 2826.94,2700 2806.94,2680 ; R13.1 3261.05,2788.65 3261.05,2703.06 3237.99,2680 2806.94,2680
NetC13_1: C13.1 R17.1 R18.2 U3.3 | length 2205.8
  Top Layer w39.37: U3.3 2680.16,2784.33 2560,2904.49 2560,3198.43 2621.57,3260 2720,3260 2790,3190 3250,3190 3410,3030 R17.1 3553.27,2935.87 C13.1 3558.55,3057.88 3591.1,3057.88 R18.2
NetC14_1: C14.1 R14.2 R19.2 U3.12 | length 528.1
  Top Layer w39.37: R19.2 C14.1
  Bottom Layer w39.37: R19.2 R14.2 2250.87,2783.46 2389.13,2783.46 U3.12
NetD1_2: D1.2 R1.1 | length 140.2
  Top Layer w39.37: R1.1 2125.6,1867 2257.33,1867 D1.2
NetD2_2: D2.2 R2.2 | length 134
  Top Layer w39.37: R2.2 D2.2
NetD3_2: D3.2 D4.2 | length 150
  Top Layer w39.37: D3.2 D4.2
NetD5_2: D5.2 D6.2 | length 150
  Top Layer w39.37: D5.2 D6.2
NetP2_4: P2.4 R16.2 R20.2 | length 737.2
  Top Layer w39.37: R20.2 1426.62,3107.4 1487.93,3046.09 1487.93,2673.81 1424.12,2610 P2.4
OE: P4.27 P4.28 | length 200
  Top Layer w39.37: P4.28 P4.27
  Bottom Layer w39.37: P4.28 P4.27
Offset: R11.1 R18.1 TP_Offset.1 U2.15 U3.9 U3.13 U3.14 | length 3637.8
  Top Layer w39.37: U3.14 U3.13 2466.94,2684.33 2490,2707.39 2490,3107.39 ; U3.9 2466.94,3084.33 2490,3107.39 ; R11.1 2986.73,3456.94 3009.79,3480 ; TP_Offset.1 3110,3480 ; U2.15 3784.61,2374.61 3784.61,2956.91 3700,3041.51 R18.1 3696.05,3378.12 3696.05,3456.94 3672.99,3480 3110,3480 ; 2490,3107.39 2490,3206.38 2603.62,3320 2786.94,3320 2810,3343.06 2810,3456.94 2833.06,3480 3009.79,3480 ; 3009.79,3480 3110,3480
RX: P2.3 U2.19 | length 842.2
  Top Layer w39.37: P2.3 1526.94,2510 1550,2486.94 1550,2013.06 1573.06,1990 U2.19
SH_CP: P4.23 P4.24 U2.16 | length 2757.1
  Top Layer w39.37: P4.24 P4.23
  Bottom Layer w39.37: P4.23 P4.24 3060,3872.13 3176.69,3755.43 3913.89,3755.43 3990,3679.32 3990,2310.79 U2.16
SH_DS: P4.29 P4.30 U2.17 | length 2968.3
  Top Layer w39.37: P4.30@3360,3877.47 P4.30 P4.29
  Bottom Layer w39.37: P4.30 P4.29 3360,4030.21 3383.06,4053.27 3430.75,4053.27 3432.28,4054.8 3487.72,4054.8 3489.25,4053.27 4016.94,4053.27 4045.12,4025.09 4045.12,2265.91 U2.17
SH_ST: P4.25 P4.26 U2.18 | length 3451
  Top Layer w39.37: P4.26 P4.25
  Bottom Layer w39.37: P4.26 P4.25 3160,4085.33 3183.06,4108.39 3407.92,4108.39 3409.45,4109.92 3510.55,4109.92 3512.08,4108.39 4066.94,4108.39 4100.24,4075.09 4100.24,2221.02 U2.18
SRCLR: P4.21 P4.22 | length 200
  Top Layer w39.37: P4.22 P4.21
  Bottom Layer w39.37: P4.22 P4.21
TX: R16.1 TP_Tx.1 U2.20 | length 1876.1
  Top Layer w39.37: TP_Tx.1 R16.1 1422.86,3199.94 1543.05,3079.75 1543.05,2571.84 1605.12,2509.77 1605.12,2113.06 1628.18,2090 U2.20
Vin: D1.1 J1.1 P1.1 R3.2 | length 311.4
  Top Layer w39.37: D1.1 2691.52,1867 2817.39,1867 R3.2 2816.44,1860.05 2773.11,1860.05 2760,1846.94 2760,1770 ; 2730,1699.28 2753.06,1676.22
Vmeas: C9.1 R9.1 TP_Vvf.1 U2.13 U3.10 | length 3655
  Top Layer w39.37: U2.13 3873.16,2493.95 3887.37,2493.95 C9.1 4187.46,2786.57 4196.51,2777.52 TP_Vvf.1
  Bottom Layer w39.37: U3.10 2496.94,2984.33 2520,2961.27 2520,2533.06 2543.06,2510 2876.94,2510 2900,2486.94 2900,2325.03 2923.06,2301.97 3582.1,2301.97 3620.43,2340.3 3620.43,2394.5 3555,2459.94 R9.1 3558.95,2796.55 3558.95,2845.88 3583.06,2870 3746.94,2870 3790,2826.94 3790,2569.21 U2.13
Vrect: C4.1 C6.1 R1.2 U1.3 | length 1066.8
  Top Layer w39.37: C4.1 1389.53,1840.94 1412.59,1864 R1.2 1886.94,1864 1910,1887.06 C6.1 1972.2,2012.2 2019.32,2059.32 2070.94,2059.32 U1.3
Vsensp: D3.1 R3.1 R4.2 R10.2 | length 858.4
  Top Layer w39.37: R10.2 2975,2043.06 2998.06,2020 D3.1 3181.31,2018.69 3181.31,1930.94 3245.59,1866.67 R3.1 R4.2
Vzc: TP_Vzc.1 U2.21 U3.8 | length 2737.6
  Top Layer w39.37: U2.21 1839.7,2260.48 1839.7,2319.7 2000,2480 2000,3505.86 2204.14,3710 2606.94,3710 2630,3686.94 2630,3424.33 U3.8
pads on no net: P2.5 P2.6 U2.1 U2.2 U2.3 U2.4 U2.5 U2.6 U2.7 U2.8 U2.11 U2.12 U2.22 U2.27 U2.28 U2.29 U2.30 U2.31 U2.32 U2.34 U2.35 U2.36

## Polygon pours and split planes (outlines as drawn)
5V on Top Layer "5V_L01_P014" (solid, pour order 14): 1010,1005 4580,1005 4580,4675 1005.32,4675
GND on Top Layer "GND_L01_P002" (solid, pour order 2): 3180,1060 4250,1060 4250,1470 3670,1470 3670,1780 3510,1780 3510,1520 3180,1520
Vin on Top Layer "VIN_L01_P003" (solid, pour order 3): 3170,1060 3170,1530 3500,1530 3500,1780 2480,1780 2480,1060
GND on Bottom Layer "GND_L02_P015" (solid, pour order 15): 1015.54,1015 4585.54,1015 4585.54,4685 1004.46,4685
Isensp on Bottom Layer "ISENSP_L02_P005" (solid, pour order 5): 1550,1065.02 1550,1740 4060,1740 4060,1055.02

## Keep-outs
Top Layer:
  the board outline again, w10

## Silkscreen, mask and mechanical layers (free items; w line width, h text height)
Top Overlay:
  text "Xinyue Zhu / Moon Zhu (09/2024)" at 4173.33,4530 h40 r270
  text "EE209 Team08 PCB Design" at 4303.33,4530 h40 r270
  text "AC Load" at 2160,1170 h40
  text "AC Source" at 3210,1000 h40
Mechanical 1:
  the board outline again, w10

## Text inside footprints (layer, text, board x,y; h text height)
C4: Top Overlay "+" at 1513.54,1714.49 h59.06 r180
C5: Top Overlay "+" at 4244.48,1906.77 h59.06 r90